# Altium PCB Telemeetria.PcbDoc
Units mm, origin at the board's own origin, x right, y up, seen from the top; angles counter-clockwise.
Board outline 152.4 x 101.6 mm, 4 copper layers (Top Layer, 5V Layer, Ground Layer, Bottom Layer), stack 0.778 mm thick; 74 components, 53 nets, 288 pads, 11 vias.
Unrouted connection lines stored in the file: 160.
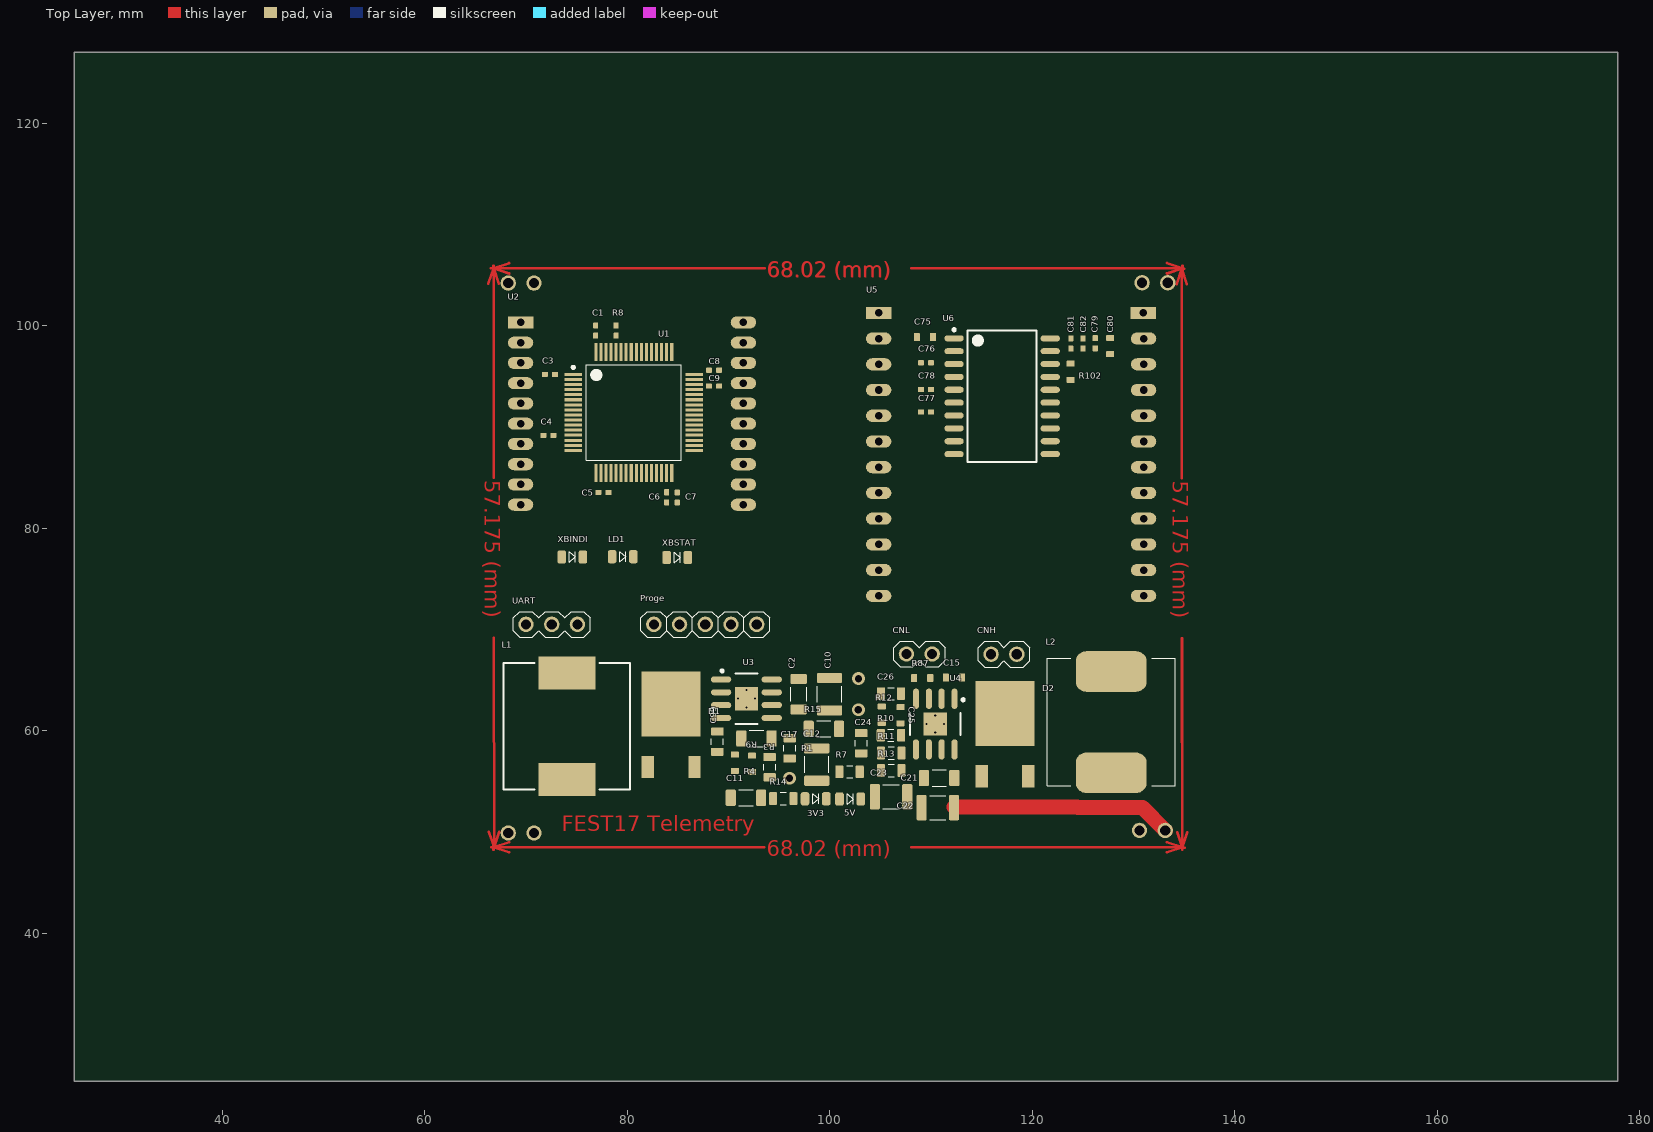
[diagram p0: Top Layer view]
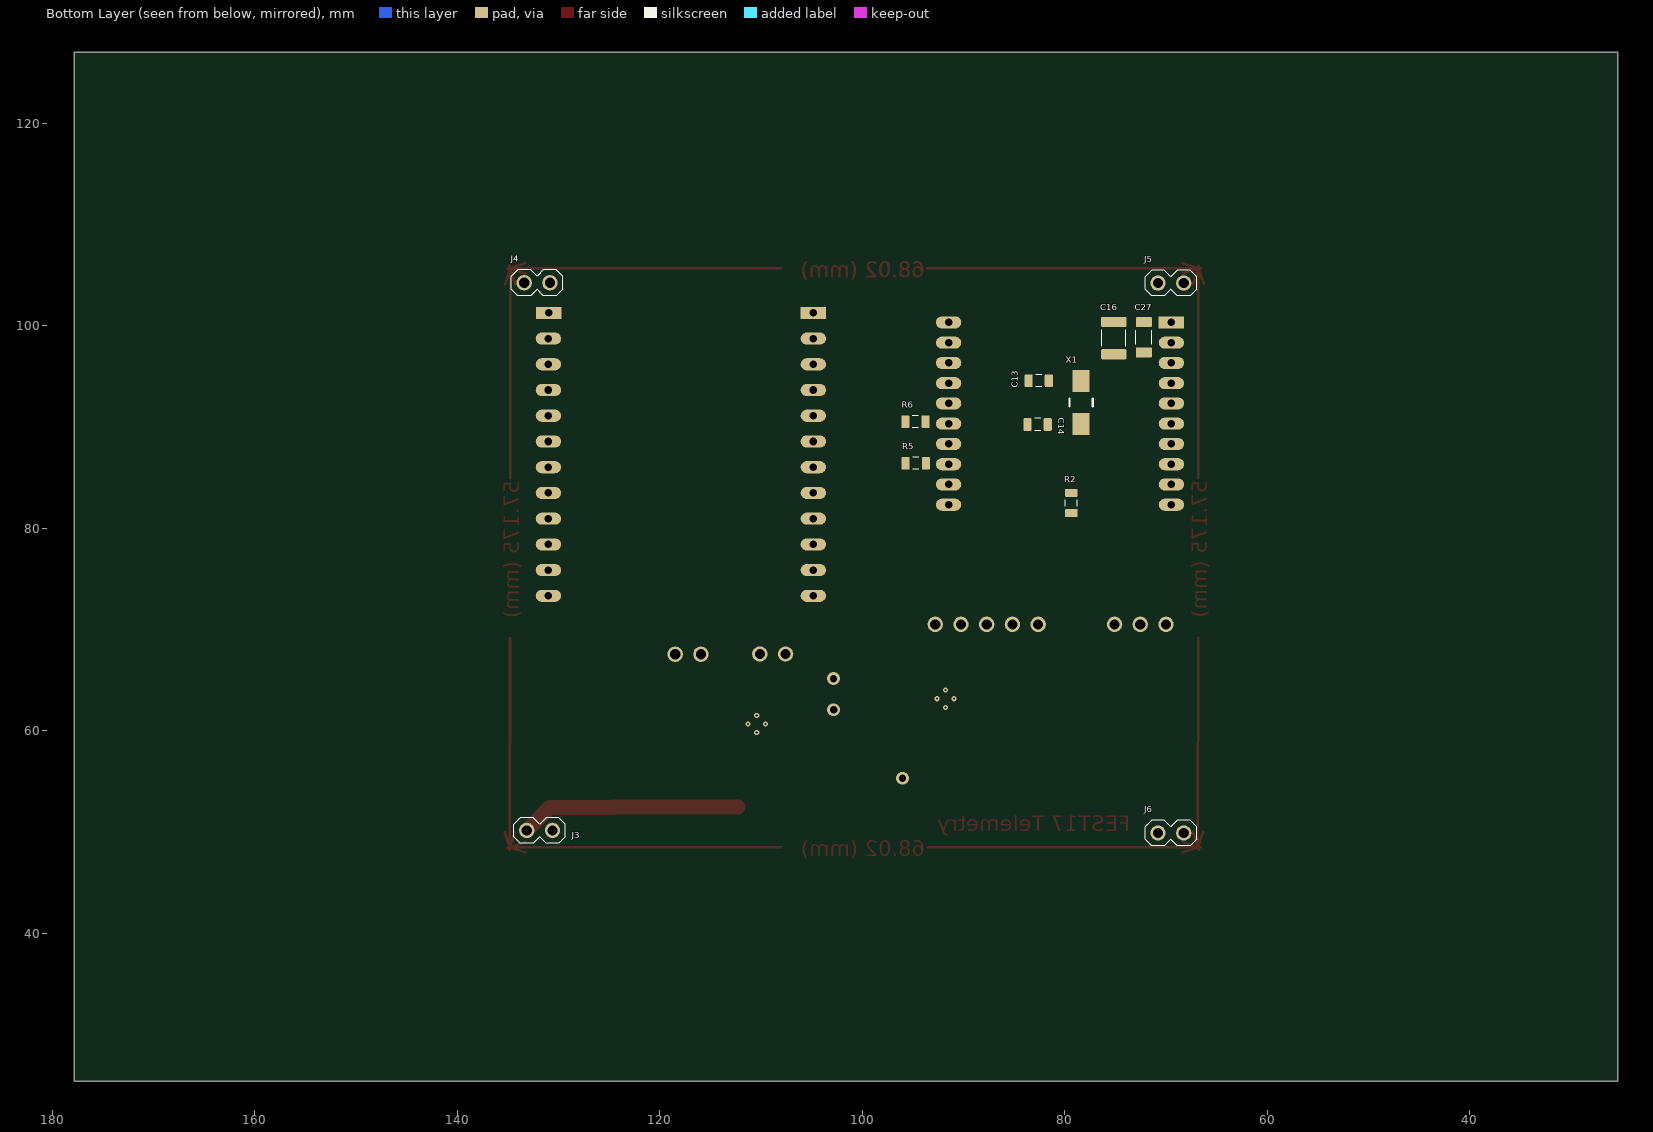
[diagram p1: Bottom Layer view, seen from below]

## Layer stack, top to bottom
Top Solder: solder mask 0.0102, Solder Resist, Dk 3.5
Top Layer: signal copper 0.0356
Dielectric 1: core 0.254, FR-4, Dk 4.2
5V Layer: signal copper 0.036
Dielectric 3: prepreg 0.127, Dk 4.2
Ground Layer: signal copper 0.036
Dielectric 2: core 0.254, Dk 4.2
Bottom Layer: signal copper 0.0356
Bottom Solder: solder mask 0.0102, Solder Resist, Dk 3.5

## Board outline
25.4,25.4 177.8,25.4 177.8,127 25.4,127

## Design rules (kind name [scope] priority, off if disabled: settings)
Clearance [All] p1: gap=0.254
PolygonConnect [All] p1: connectstyle=Relief reliefconductorwidth=0.254 reliefentries=4 polygonreliefangle="90 Angle" airgapwidth=0.254
RoomDefinition Isoleeritud_can [InComponentClass('Isoleeritud_can')] p1 off: confinementstyle=ConfineIn formatcopy=TRUE lockcomponents=FALSE outline 179.197,109.703 267.97,109.703 267.97,126.213 179.197,126.213
RoomDefinition Elektriskeem [InComponentClass('Elektriskeem')] p2 off: confinementstyle=ConfineIn formatcopy=TRUE lockcomponents=FALSE outline 179.324,74.473 390.017,74.473 390.017,108.001 179.324,108.001
RoomDefinition 24V_to_5V_regulator [InComponentClass('24V_to_5V_regulator')] p3 off: confinementstyle=ConfineIn formatcopy=TRUE lockcomponents=FALSE outline 178.689,43.831 265.557,43.831 265.557,64.151 178.689,64.151
RoomDefinition 24V_to_3V3_regulator [InComponentClass('24V_to_3V3_regulator')] p4 off: confinementstyle=ConfineIn formatcopy=TRUE lockcomponents=FALSE outline 178.943,26.924 259.08,26.924 259.08,42.926 178.943,42.926
RoutingVias [All] p1: holewidth=0.711 width=1.27 viastyle="Through Hole" minholewidth=0.711 minwidth=1.27 maxholewidth=0.711 maxwidth=1.27
SolderMaskExpansion [All] p1: expansion=0.102
Width [All] p1: maxlimit=1.5 minlimit=0.254 preferedwidth=0.254
30 further rules are at their usual default settings.

## Classes and differential pairs
component class Isoleeritud_can: C15 C75 C76 C77 C78 C79 C80 C81 C82 CNH CNL R87 R102 U6
component class Elektriskeem: 3V3 5V C1 C3 C4 C5 C6 C7 C8 C9 C13 C14 C16 C27 J3 J4 J5 J6 LD1 Proge R2 R5 R6 R7 R8 R14 U1 U2 U5 UART X1 XBINDI XBSTAT
component class 24V_to_5V_regulator: C21 C22 C23 C24 C25 C26 D2 L2 R10 R11 R12 R13 U4
component class 24V_to_3V3_regulator: C2 C10 C11 C12 C17 C18 C99 D1 L1 R1 R3 R4 R9 R15 U3

## Components (designator, comment, footprint, x,y, rotation, side; value= is the part's Value field where it differs from the comment)
3V3 "0805, green, 50mcd" LED2012X06N 98.603,53.289 r180 top
5V "0805, green, 50mcd" LED2012X06N 102.006,53.264 r180 top
C1 "100nF, 50V, 0402" "1005 [0402] CAP" 76.886,99.517 r270 top
C2 "220nF, 50V, 1206" "3216 [1206] CAP" 96.926,63.613 r90 top
C3 "100nF, 50V, 0402" "1005 [0402] CAP" 72.365,95.199 r180 top
C4 "100nF, 50V, 0402" "1005 [0402] CAP" 72.212,89.179 r0 top
C5 "100nF, 50V, 0402" "1005 [0402] CAP" 77.648,83.541 r180 top
C6 "2.2uF, 50V, 0402" "1005 [0402] CAP" 83.896,83.058 r270 top
C7 "100nF, 50V, 0402" "1005 [0402] CAP" 84.938,83.033 r90 top
C8 "100nF, 50V, 0402" "1005 [0402] CAP" 88.57,95.606 r180 top
C9 "2.2uF, 50V, 0402" "1005 [0402] CAP" 88.57,94.031 r180 top
C10 "2.2uF, 50V, 1210" "3225 [1210] CAP" 99.974,63.613 r270 top
C11 "22uF, 6.3V, 1206" "3216 [1206] CAP" 91.719,53.391 r180 top
C12 "3.9nF, 50V, 1210" "3225 [1210] CAP" 98.704,56.667 r90 top
C13 "27pF, 50V, 0805" "2012 [0805] CAP" 82.575,94.564 r0 bottom
C14 "27pF, 50V, 0805" "2012 [0805] CAP" 82.677,90.246 r180 bottom
C15 "4.7nF, 0603" "1608 [0603] CAP" 112.268,65.253 r0 top
C16 "1uF, 50V, 1210" "3225 [1210] CAP" 75.159,98.781 r270 bottom
C17 "390pF, 1206" "3216 [1206] CAP" 92.761,59.233 r180 top
C21 "220nF, 50V, 1206" "3216 [1206] CAP" 110.795,55.333 r0 top
C22 "4.7uF, 50V, 1210" "3225 [1210] CAP" 110.668,52.412 r180 top
C23 "68uF, 6.3V, 1210" "3225 [1210] CAP" 106.045,53.492 r0 top
C24 "12nF, 50V, 0805" "2012 [0805] CAP" 103.099,58.776 r90 top
C25 "1.2nF, 0603" "1608 [0603] CAP" 106.985,61.544 r90 top
C26 "56nF, 50V, 0805" "2012 [0805] CAP" 106.045,63.678 r0 top
C27 "68pF, 50V, 1206" "3216 [1206] CAP" 72.187,98.857 r270 bottom
C75 "10uF, 0603" "1608 [0603] CAP" 109.398,98.882 r0 top
C76 "100nF, 0402" "1005 [0402] CAP" 109.499,96.342 r0 top
C77 "10nF, 0402" "1005 [0402] CAP" 109.499,91.491 r0 top
C78 "100nF, 0402" "1005 [0402] CAP" 109.499,93.701 r0 top
C79 "100nF, 0402" "1005 [0402] CAP" 126.213,98.273 r90 top
C80 "10uF, 0603" "1608 [0603] CAP" 127.686,97.993 r90 top
C81 "100nF, 0402" "1005 [0402] CAP" 123.8,98.247 r90 top
C82 "10nF, 0402" "1005 [0402] CAP" 124.993,98.247 r90 top
C99 "18nF, 50V, 1210" "2012 [0805] CAP" 88.9,58.928 r90 top
CNH "2.54mm" "Pin Header 2x1" 118.466,67.564 r180 top
CNL "2.54mm" "Pin Header 2x1" 107.569,67.589 r0 top
D1 "45Vbr, 10A, 0.50Vf" "DPAK (TO252-3)" 84.328,56.439 r0 top
D2 "45Vbr, 10A, 0.50Vf" "DPAK (TO252-3)" 117.297,55.524 r0 top
J3 "2.54mm" "Pin Header 2x1" 133.121,50.165 r180 bottom
J4 "2.54mm" "Pin Header 2x1" 130.835,104.242 r0 bottom
J5 "2.54mm" "Pin Header 2x1" 70.79,104.216 r180 bottom
J6 "2.54mm" "Pin Header 2x1" 70.79,49.911 r180 bottom
L1 "4.7uH, 6.8A" "12.5 x 12.5 x 8.5 (mm)" 74.041,60.452 r270 top
L2 "18uH, 5.2A" "SRR12xx IND" 127.787,60.858 r90 top
LD1 "0805, green, 50mcd" LED2012X06N 79.553,77.191 r180 top
Proge "Pin Header 5x1" "Pin Header 5x1" 92.786,70.51 r180 top
R1 "110R" "2012 [0805] RES" 96.037,58.268 r270 top
R2 "1k, 125mW, 0805" "2012 [0805] RES" 79.35,82.499 r90 bottom
R3 "4.7k, 0805" "2012 [0805] RES" 94.056,56.413 r270 top
R4 "1k, 0603" "1608 [0603] RES" 90.627,56.845 r270 top
R5 "1k, 125mW, 0805" "2012 [0805] RES" 94.717,86.411 r180 bottom
R6 "1k, 125mW, 0805" "2012 [0805] RES" 94.742,90.526 r180 bottom
R7 "1k, 125mW, 0805" "2012 [0805] RES" 101.956,55.956 r0 top
R8 "10K  0402" "1005 [0402] RES" 78.892,99.517 r90 top
R9 "1.05k, 0603" "1608 [0603] RES" 92.329,56.744 r90 top
R10 "110R" "2012 [0805] RES" 106.036,59.563 r180 top
R11 "4.7k, 0805" "2012 [0805] RES" 106.07,57.81 r180 top
R12 "1k, 0603" "1608 [0603] RES" 105.131,61.595 r270 top
R13 "787R, 0805" "2012 [0805] RES" 106.07,56.083 r0 top
R14 "1k, 125mW, 0805" "2012 [0805] RES" 95.402,53.315 r180 top
R15 "78.7k, 250mW, 1206" "3216 [1206] RES" 99.416,60.198 r180 top
R87 "120R, 63mW, 0603" "1608 [0603] RES" 109.118,65.202 r180 top
R102 "?R, ?mW, 0805" "1608 [0603] RES" 123.774,95.453 r270 top
U1 "STM32F4 64-pin" LQFP64 80.645,91.44 r0 top
U2 "Xbee" "XBEE - duplicate1" 69.469,100.33 r0 top
U3 "L7981ATR" HSOP8-D1_N 91.77,63.17 r0 top
U4 "L7981ATR" HSOP8-D1_N 110.414,60.667 r270 top
U5 "A6_GSM_MODULE" A6_gsm_module 104.826,101.27 r0 top
U6 "1" "ADM3053 CAN IC" 117.018,93.04 r0 top
UART "Pin Header 3x1" "Pin Header 3x1" 75.082,70.51 r180 top
X1 "8 MHz" "5.0x3.2 SMD Crystal" 78.384,92.431 r270 bottom
XBINDI "0805, green, 50mcd" LED2012X06N 74.574,77.165 r180 top
XBSTAT "0805, green, 50mcd" LED2012X06N 84.938,77.114 r180 top

## Footprints (in the part's own frame and the unit in brackets; to place one, negate y for a bottom-side part, rotate by r counter-clockwise, add the part's x,y. Pads: shape width x height; smd on the part's side, far side on the other; paste and mask are expansions set on the pad)
"5.0x3.2 SMD Crystal" [mm]
  rect 2.15x1.7 smd: 1(-2.125,0) 2(2.125,0)
  silkscreen extent -0.4,-1.15 0.4,1.15, body extent -2.5,-1.6 2.5,1.6, height 1.3
"12.5 x 12.5 x 8.5 (mm)" [mm] "Precision Wire Wound Inductor, 2-Leads, Body 12,50x12,50mm, IPC Medium Density"
  rect 3.25x5.6 smd: 1(-5.25,0) 2(5.25,0)
  silkscreen extent -6.25,-6.25 6.25,6.25, body extent -6.35,-6.25 6.35,6.25, height 8.6
"1005 [0402] CAP" [mm]
  rrect25% 0.6x0.5 smd mask+0.05: 1(-0.5,0) 2(0.5,0)
  body extent -0.5,-0.25 0.5,0.25, height 0.49
"1005 [0402] RES" [mm] "Chip Resistor, 2-Leads, Body 1.00x0.50mm, IPC High Density"
  rrect25% 0.6x0.5 smd mask+0.05: 1(-0.5,0) 2(0.5,0)
  body extent -0.5,-0.25 0.5,0.25, height 0.35
"1608 [0603] CAP" [mm]
  rrect25% 0.6x0.8 smd mask+0.05: 1(-0.8,0) 2(0.8,0)
  body extent -0.93,-0.41 0.93,0.41, height 0.81
"1608 [0603] RES" [mm]
  rrect25% 0.6x0.8 smd mask+0.05: 1(-0.8,0) 2(0.8,0)
  body extent -0.8,-0.4 0.8,0.4, height 0.46
"2012 [0805] CAP" [mm]
  rrect25% 0.8x1.25 smd mask+0.05: 1(-1,0) 2(1,0)
  silkscreen extent -0.3,-0.6 0.3,0.6, body extent -1.09,-0.64 1.09,0.64, height 1.26
"2012 [0805] RES" [mm]
  rrect25% 0.8x1.25 smd mask+0.05: 1(-1,0) 2(1,0)
  silkscreen extent -0.3,-0.6 0.3,0.6, body extent -1,-0.62 1,0.63, height 0.6
"3216 [1206] CAP" [mm]
  rrect25% 1x1.6 smd mask+0.05: 1(-1.5,0) 2(1.5,0)
  silkscreen extent -0.7,-0.8 0.7,0.8, body extent -1.75,-0.81 1.75,0.81, height 1.61
"3216 [1206] RES" [mm]
  rrect25% 1x1.6 smd mask+0.05: 1(-1.5,0) 2(1.5,0)
  silkscreen extent -0.7,-0.8 0.7,0.8, body extent -1.6,-0.8 1.6,0.8, height 0.6
"3225 [1210] CAP" [mm]
  rrect25% 1x2.5 smd mask+0.05: 1(-1.6,0) 2(1.6,0)
  silkscreen extent -0.8,-1.2 0.8,1.2, body extent -1.6,-1.25 1.6,1.25, height 0.79
A6_gsm_module [mm]
  rect 2.5x1.2 hole 0.75: 1(0,0) 24(26.121,0)
  oval 2.5x1.2 hole 0.75: 2(0,-2.54) 3(0,-5.08) 4(0,-7.62) 5(0,-10.16) 6(0,-12.7) 7(0,-15.24) 8(0,-17.78) 9(0,-20.32) 10(0,-22.86) 12(0,-27.94) 13(26.162,-27.94) 15(26.162,-22.86) 16(26.162,-20.32) 17(26.162,-17.78) 18(26.162,-15.24) 19(26.162,-12.7) 20(26.162,-10.16) 21(26.162,-7.62) 22(26.162,-5.08) 23(26.162,-2.54)
  oval 2.5x1.2 hole 0.75 paste+0: 11(0,-25.4) 14(26.162,-25.4)
  body extent -1.07,-29.12 27.16,1.29, height 4.5
"ADM3053 CAN IC" [mm] "SOIC, 20-Leads, Body 12,80x7,50mm, Pitch 1,27mm, IPC Medium Density"
  oval 1.9x0.6 smd: 1(-4.75,5.715) 2(-4.75,4.445) 3(-4.75,3.175) 4(-4.75,1.905) 5(-4.75,0.635) 6(-4.75,-0.635) 7(-4.75,-1.905) 8(-4.75,-3.175) 9(-4.75,-4.445) 10(-4.75,-5.715) 11(4.75,-5.715) 12(4.75,-4.445) 13(4.75,-3.175) 14(4.75,-1.905) 15(4.75,-0.635) 16(4.75,0.635) 17(4.75,1.905) 18(4.75,3.175) 19(4.75,4.445) 20(4.75,5.715)
  silkscreen extent -4.87,-6.5 3.4,6.69, body extent -3.8,-6.5 3.8,6.5, height 2.65
"DPAK (TO252-3)" [mm]
  rect 1.2x2.2 smd mask+0.05: 1(-2.3,0) 3(2.3,0)
  rect 5.8x6.4 smd mask+0.05: 2(0,6.2)
  body extent -3.29,-0.7 3.29,9, height 2.3
HSOP8-D1_N [mm] "SOIC, 8-Leads, Body 4.9x3.9mm, Pitch 1.27mm, Thermal Pad, IPC Medium Density"
  oval 2x0.6 smd: 1(-2.5,1.905) 2(-2.5,0.635) 3(-2.5,-0.635) 4(-2.5,-1.905) 5(2.5,-1.905) 6(2.5,-0.635) 7(2.5,0.635) 8(2.5,1.905)
  rect 2.3x2.3 smd paste-1.15: 9(0,0)
  silkscreen extent -2.52,-2.5 1.1,2.88, body extent -2,-2.5 2,2.5, height 1.7
LED2012X06N [mm] "0805 Led, 2-Leads, Body 2,00x1,25mm, IPC Medium Density"
  rrect50% 0.85x1.3 smd mask+0.05: 1(-1.05,0) 2(1.05,0)
  silkscreen extent -0.3,-0.5 0.3,0.5, body extent -1.04,-0.63 1.02,0.63, height 0.85
LQFP64 [mm]
  rect 1.75x0.3 smd mask+0.05: 1(-5.975,3.75) 2(-5.975,3.25) 3(-5.975,2.75) 4(-5.975,2.25) 5(-5.975,1.75) 6(-5.975,1.25) 7(-5.975,0.75) 8(-5.975,0.25) 9(-5.975,-0.25) 10(-5.975,-0.75) 11(-5.975,-1.25) 12(-5.975,-1.75) 13(-5.975,-2.25) 14(-5.975,-2.75) 15(-5.975,-3.25) 16(-5.975,-3.75) 33(5.975,-3.75) 34(5.975,-3.25) 35(5.975,-2.75) 36(5.975,-2.25) 37(5.975,-1.75) 38(5.975,-1.25) 39(5.975,-0.75) 40(5.975,-0.25) 41(5.975,0.25) 42(5.975,0.75) 43(5.975,1.25) 44(5.975,1.75) 45(5.975,2.25) 46(5.975,2.75) 47(5.975,3.25) 48(5.975,3.75)
  rect 0.3x1.75 smd mask+0.05: 17(-3.75,-5.975) 18(-3.25,-5.975) 19(-2.75,-5.975) 20(-2.25,-5.975) 21(-1.75,-5.975) 22(-1.25,-5.975) 23(-0.75,-5.975) 24(-0.25,-5.975) 25(0.25,-5.975) 26(0.75,-5.975) 27(1.25,-5.975) 28(1.75,-5.975) 29(2.25,-5.975) 30(2.75,-5.975) 31(3.25,-5.975) 32(3.75,-5.975) 49(3.75,5.975) 50(3.25,5.975) 51(2.75,5.975) 52(2.25,5.975) 53(1.75,5.975) 54(1.25,5.975) 55(0.75,5.975) 56(0.25,5.975) 57(-0.25,5.975) 58(-0.75,5.975) 59(-1.25,5.975) 60(-1.75,5.975) 61(-2.25,5.975) 62(-2.75,5.975) 63(-3.25,5.975) 64(-3.75,5.975)
  silkscreen extent -6.1,-4.7 4.7,4.7, body extent -6,-6 6,6, height 1.5
"Pin Header 2x1" [mil]
  round 60 hole 39.37 mask+1.97: 1(0,0) 2(100,0)
  silkscreen extent -50,-50 150,50, body extent -50,-49 150,49, height 336
"Pin Header 3x1" [mil]
  round 60 hole 39.37 mask+1.97: 1(0,0) 2(100,0) 3(200,0)
  silkscreen extent -50,-50 250,50, body extent -50,-49 250,49, height 336
"Pin Header 5x1" [mil]
  round 60 hole 39.37 mask+1.97: 1(0,0) 2(100,0) 3(200,0) 4(300,0) 5(400,0)
  silkscreen extent -50,-50 450,50, body extent -50,-49 450,49, height 336
"SRR12xx IND" [mm] "Bourns SRR 12xx series 12x12mm SMD"
  rrect50% 4x7 smd mask+0.05: 1(-5,0) 2(5,0)
  silkscreen extent -6.3,-6.3 6.3,6.3, body extent -6.35,-6.35 6.35,6.35, height 8.5
"XBEE - duplicate1" [mm]
  rect 2.5x1.2 hole 0.75: 1(0,0)
  oval 2.5x1.2 hole 0.75: 2(0,-2) 3(0,-4) 4(0,-6) 5(0,-8) 6(0,-10) 7(0,-12) 8(0,-14) 9(0,-16) 10(0,-18) 11(22,-18) 12(22,-16) 13(22,-14) 14(22,-12) 15(22,-10) 16(22,-8) 17(22,-6) 18(22,-4) 19(22,-2) 20(22,0)
  body extent -1,-19.48 23,1.5, height 4.5

## Part data
3V3 5V LD1 XBINDI XBSTAT: library part LED, "Cathode (-) marked by silkscreen line"
C1 C2 C3 C4 C5 C6 C7 C8 C9 C10 C11 C12 C13 C14 C15 C16 C17 C21 C22 C23 C24 C25 C26 C27 C75 C76 C77 C78 C79 C80 C81 C82 C99: library part Capacitor
CNH CNL J3 J4 J5 J6: library part "Pin Header 2x1"
D1 D2: library part "Diode Shottky"
L1 L2: library part Inductor
R1 R2 R3 R4 R5 R6 R7 R8 R9 R10 R11 R12 R13 R14 R15 R87 R102: library part Resistor
U3 U4: "3 A step-down switching regulator, 8-Pin HSOP, Tape and Reel"
U6: library part Component_1
X1: library part Crystal

## Via types
v1: diameter 0.5, hole 0.2, Top Layer to Bottom Layer, 8 vias
v2: diameter 1.27, hole 0.711, Top Layer to Bottom Layer, 3 vias

## Nets (pads, with @x,y where several pads share a name; then routed paths per layer and width w, separated by ;. In a path a pad name is that pad's centre, name@x,y a point inside that pad or via, vN(x,y) a via of type N, cw(c..) or ccw(c..) an arc to the next point about the centre after c; other vN are vias at no path point)
3V3: C1.2 C3.1 C4.2 C5.1 C7.2 C8.2 C11.1 C12.1 C16.1 C27.1 L1.2 Proge.1 R3.2 R14.2 U1.1 U1.13 U1.19 U1.32 U1.48 U1.64 U2.1
5V: C23.1 C24.1 C75.1 C76.1 C77.1 C78.1 L2.2 R7.2 R11.2 U5.1 U6.6 U6.8
5VON: U1.41
24V: C2.2 C10.1 C21.2 C22.1 J3.1 U3.3 U3.8 U4.3 U4.8 | length 21.8
  Top Layer w1.5: C22.1@112.268,52.476 124.429,52.476 124.483,52.423 130.864,52.423 J3.1
BOOT0: R8.1 U1.60
CAN1_H: CNH.2 J4.1 U6.17
CAN1_L: CNL.1 J4.2 U6.15
CAN_GND: C79.2 C80.2 C81.2 C82.2 R102.2 U6.11 U6.13 U6.16 U6.20
CAN_RX: U1.33 U6.4
CAN_TX: U1.34 U6.5
DIN: U1.42 U2.3 UART.2
DOUT: U1.43 U2.2 UART.1
GND: 3V3.1 5V.1 C1.1 C2.1 C3.2 C4.1 C5.2 C6.2 C7.1 C8.1 C9.1 C10.2 C11.2 C13.2 C14.1 C15.2 C16.2 C21.1 C22.2 C23.2 C27.2 C75.2 C76.2 C77.2 C78.2 D1.3 D2.3 J3.2 LD1.1 Proge.3 R8.2 R9.1 R13.1 R15.1 U1.12 U1.18 U1.63 U2.10 U3.7 U4.7 U5.2 U5.14 U6.1 U6.3 U6.7 U6.9 U6.10 UART.3 XBINDI.1 XBSTAT.1
GSM_PWR: U1.35 U5.13
GSM_RESET: U1.36 U5.19
GSM_U_RX: U1.37 U5.9
GSM_U_TX: U1.38 U5.8
LED1: R2.2 U1.22
LED2: U1.23
LED3: U1.24
LED4: U1.25
LED5: U1.26
Net3V3_2: 3V3.2 R14.1
Net5V_2: 5V.2 R7.1
NetC6_1: C6.1 U1.31
NetC9_2: C9.2 U1.47
NetC12_2: C12.2 R1.2
NetC15_1: C15.1 CNH.1 R87.1
NetC17_1: C17.1 R1.1 R3.1 R4.2 R9.2 U3.5
NetC17_2: C17.2 C99.2 U3.4
NetC24_2: C24.2 R10.2
NetC25_1: C25.1 R10.1 R11.1 R12.2 R13.2 U4.5
NetC25_2: C25.2 C26.2 U4.4
NetC26_1: C26.1 R12.1
NetC79_1: C79.1 C80.1 C81.1 C82.1 U6.12 U6.19
NetC99_1: C99.1 R4.1
NetCNL_2: CNL.2 R87.2
NetD1_1: D1.2 L1.1 U3.1
NetD2_1: D2.2 L2.1 U4.1
NetLD1_2: LD1.2 R2.1
NetR5_1: R5.1 XBSTAT.2
NetR6_1: R6.1 XBINDI.2
NetR15_2: R15.2 U3.6
NetR102_1: R102.1 U6.18
NRST: Proge.5 U1.7
"OSC IN": C13.1 U1.5 X1.1
"OSC OUT": C14.2 U1.6 X1.2
RESET: U2.5
SWCLK: Proge.2 U1.49
SWDIO: Proge.4 U1.46
XBINDI: R6.2 U2.15
XBSLP: U1.27 U2.9
XBSTAT: R5.2 U2.13
pads on no net: D1.1 D2.1 J5.1 J5.2 J6.1 J6.2 U1.2 U1.3 U1.4 U1.8 U1.9 U1.10 U1.11 U1.14 U1.15 U1.16 U1.17 U1.20 U1.21 U1.28 U1.29 U1.30 U1.39 U1.40 U1.44 U1.45 U1.50 U1.51 U1.52 U1.53 U1.54 U1.55 U1.56 U1.57 U1.58 U1.59 U1.61 U1.62 U2.4 U2.6 U2.7 U2.8 U2.11 U2.12 U2.14 U2.16 U2.17 U2.18 U2.19 U2.20 U3.2 U3.9 U4.2 U4.6 U4.9 U5.3 U5.4 U5.5 U5.6 U5.7 U5.10 U5.11 U5.12 U5.15 U5.16 U5.17 U5.18 U5.20 U5.21 U5.22 U5.23 U5.24 U6.2 U6.14
copper on no net: | length 280.5
  Top Layer w0.254: 66.295,104.165 66.802,105.689 ; 66.343,50.038 66.853,48.514 ; 66.548,105.689 67.056,105.69 ; 66.599,48.514 67.107,48.514 ; 66.797,48.255 66.797,48.763 ; 66.797,105.43 66.797,105.938 ; 66.82,84.999 66.802,105.689 ; 66.822,105.405 66.822,105.913 ; 66.834,69.205 66.853,48.514 ; 67.311,104.166 66.802,105.689 ; 67.359,50.038 66.853,48.514 ; 68.321,48.001 66.797,48.509 ; 68.321,49.017 66.797,48.509 ; 68.321,105.176 66.797,105.684 ; 68.321,106.192 66.797,105.684 ; 68.346,105.151 66.822,105.659 ; 68.346,106.167 66.822,105.659 ; 93.545,48.509 66.797,48.509 ; 93.545,105.684 66.797,105.684 ; 93.57,105.659 66.822,105.659 ; 108.069,48.509 134.817,48.509 ; 108.069,105.684 134.817,105.684 ; 108.094,105.659 134.842,105.659 ; 133.293,48.001 134.817,48.509 ; 133.293,49.017 134.817,48.509 ; 133.293,105.176 134.817,105.684 ; 133.293,106.192 134.817,105.684 ; 133.318,105.151 134.842,105.659 ; 133.318,106.167 134.842,105.659 ; 134.24,104.114 134.747,105.639 ; 134.288,49.987 134.798,48.463 ; 134.493,105.638 135.001,105.639 ; 134.544,48.463 135.052,48.463 ; 134.765,84.948 134.747,105.639 ; 134.779,69.154 134.798,48.463 ; 134.817,48.255 134.817,48.763 ; 134.817,105.43 134.817,105.938 ; 134.842,105.405 134.842,105.913 ; 135.256,104.115 134.747,105.639 ; 135.304,49.988 134.798,48.463
  other v1: 110.414,59.817 109.564,60.667 111.264,60.667 110.414,61.517 91.77,62.32 90.92,63.17 92.62,63.17 91.77,64.02
  other v2: 96.012,55.321 102.819,62.078 102.845,65.151

## Other copper
Top Layer:
  text "68.02 (mm)" at 93.799,104.77 h1.52
  text "68.02 (mm)" at 93.824,104.744 h1.52
  text "57.175 (mm)" at 65.906,84.744 h1.52 r270.05
  text "57.175 (mm)" at 133.851,84.693 h1.52 r270.05
  text "FEST17 Telemetry" at 73.533,50.063 h1.52
  text "68.02 (mm)" at 93.799,47.594 h1.52